# EAGLE board Connection (EAGLE 9.6.2)
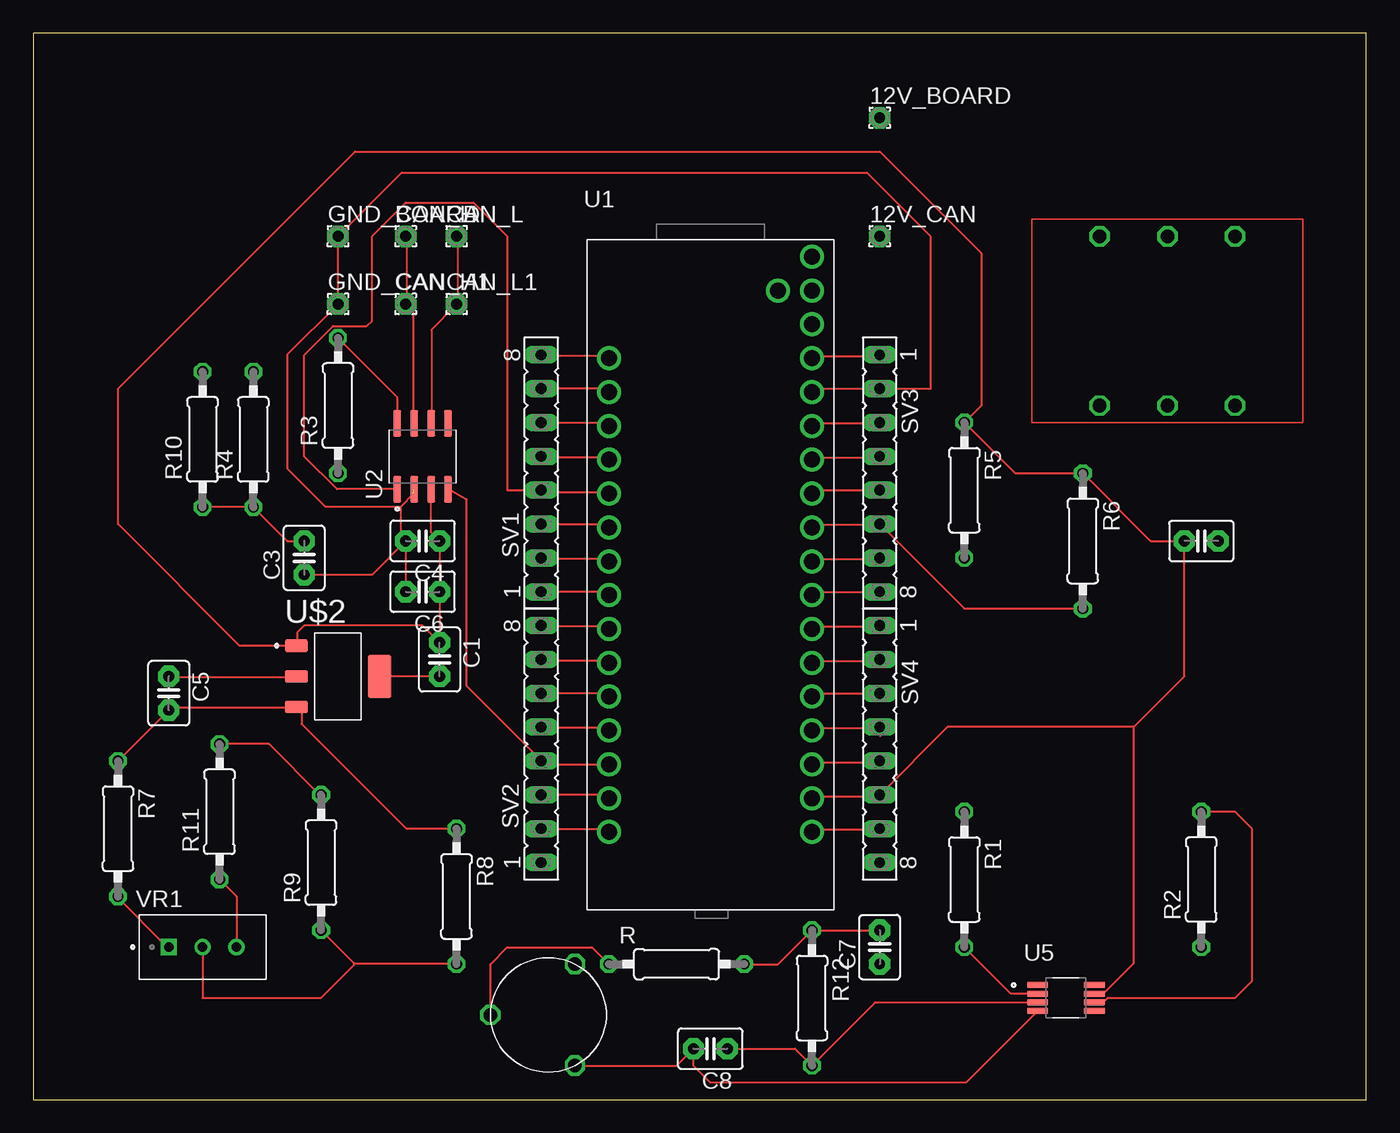
[diagram p0: board, top side]
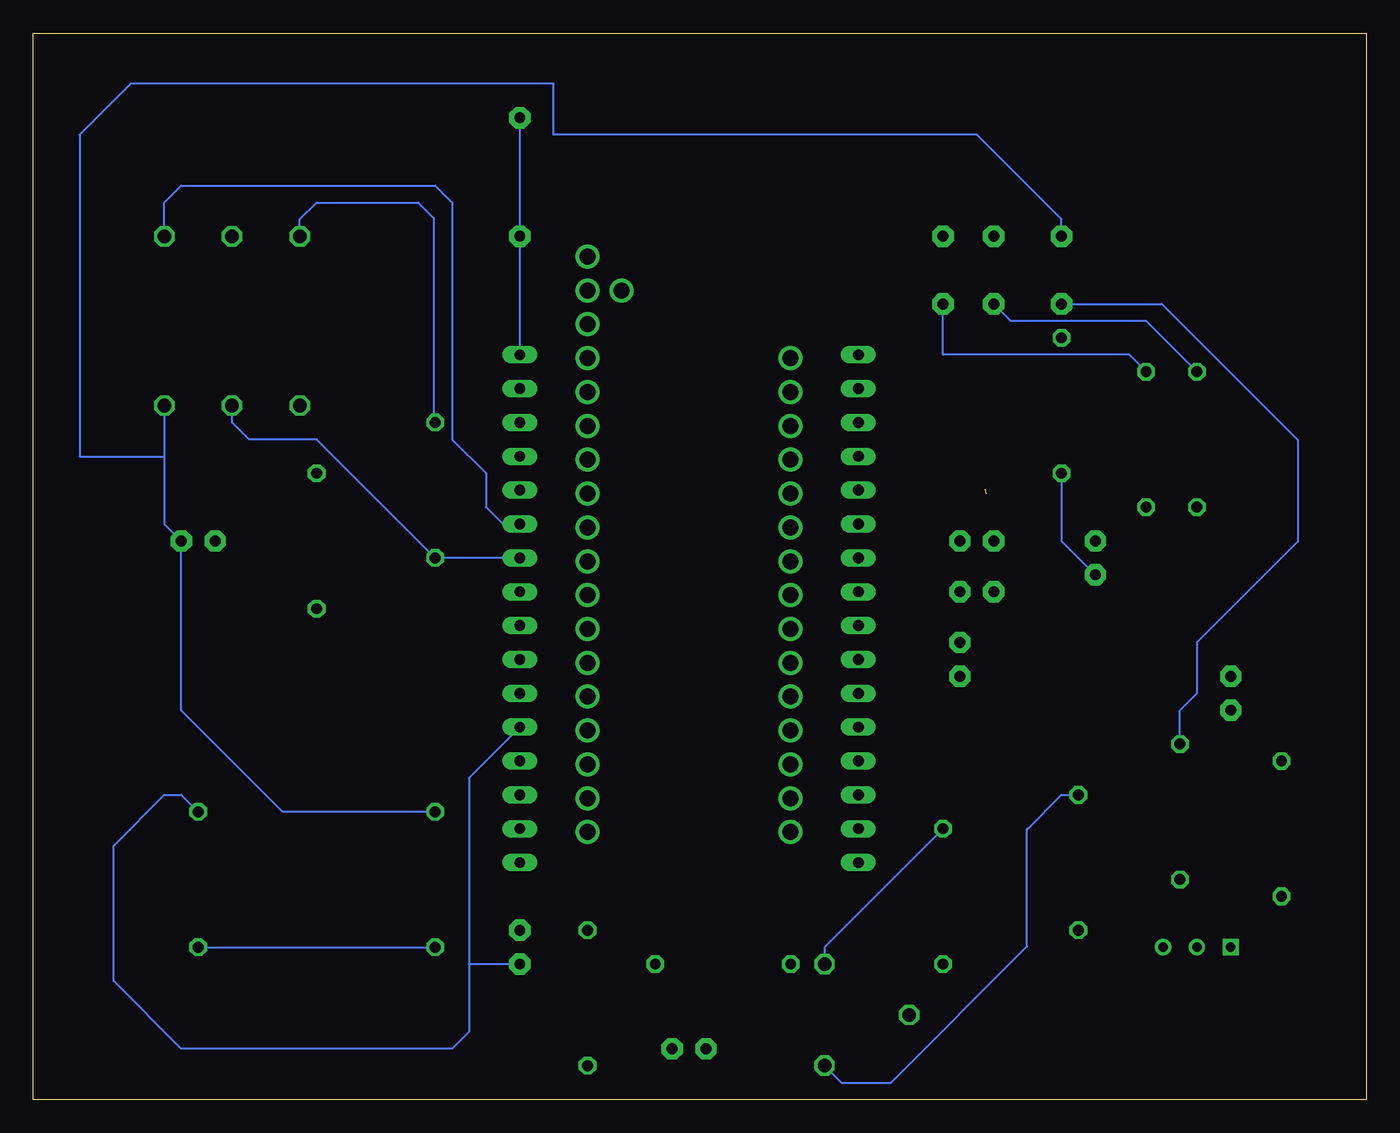
[diagram p1: board, bottom side, seen from below]

Size 100 x 80 mm. Coordinates in mm from the lower left corner, seen from the top.
Outline: 0,0 100,0 100,80 0,80 0,0
Copper layers (1*16): Top 0.035mm / dielectric 1.5mm / Bottom 0.035mm
Design rules "default": minimum track width 6mil, minimum drill 0.35mm, track to track 6mil, track to pad 6mil, pad to pad 6mil, via to via 6mil, smd to smd 6mil, copper to edge 40mil, drill to drill 6mil, minimum pad ring 10mil, minimum via ring 8mil, stop-mask expansion 4mil, vias tented up to drill 0mil, thermal gap 10mil

## Footprints (pad centres in the part's own frame; a part is rotated, then mirrored left to right if it is on the bottom)
1,6/0,8 = drill 0.813 pad 1.6 octagon: 1 0,0
C2.5-3 = drill 0.813 pad 1.6 octagon: 1 -1.27,0; 2 1.27,0
0207/10 = drill 0.813 octagon: 1 -5.08,0; 2 5.08,0
FE08 = drill 0.813 long: 1 -8.89,0; 2 -6.35,0; 3 -3.81,0; 4 -1.27,0; 5 1.27,0; 6 3.81,0; 7 6.35,0; 8 8.89,0
MODULE_NUCLEO-G431KB = drill 1.2: CN2_1 5.08,21.336; CN2_2 7.62,23.876; CN2_3 7.62,21.336; CN2_4 7.62,18.796; CN3_1 7.62,16.256; CN3_2 7.62,13.716; CN3_3 7.62,11.176; CN3_4 7.62,8.636; CN3_5 7.62,6.096; CN3_6 7.62,3.556; CN3_7 7.62,1.016; CN3_8 7.62,-1.524; CN3_9 7.62,-4.064; CN3_10 7.62,-6.604; CN3_11 7.62,-9.144; CN3_12 7.62,-11.684; CN3_13 7.62,-14.224; CN3_14 7.62,-16.764; CN3_15 7.62,-19.304; CN4_1 -7.62,16.256; CN4_2 -7.62,13.716; CN4_3 -7.62,11.176; CN4_4 -7.62,8.636; CN4_5 -7.62,6.096; CN4_6 -7.62,3.556; CN4_7 -7.62,1.016; CN4_8 -7.62,-1.524; CN4_9 -7.62,-4.064; CN4_10 -7.62,-6.604; CN4_11 -7.62,-9.144; CN4_12 -7.62,-11.684; CN4_13 -7.62,-14.224; CN4_14 -7.62,-16.764; CN4_15 -7.62,-19.304
SOIC127P599X175-8N = smd 1.97 x 0.6: 1 -2.47,1.905; 2 -2.47,0.635; 3 -2.47,-0.635; 4 -2.47,-1.905; 5 2.47,-1.905; 6 2.47,-0.635; 7 2.47,0.635; 8 2.47,1.905
SOP65P490X110-8N = smd 1.62 x 0.5: 1 -2.12,0.975; 2 -2.12,0.325; 3 -2.12,-0.325; 4 -2.12,-0.975; 5 2.12,-0.975; 6 2.12,-0.325; 7 2.12,0.325; 8 2.12,0.975
MP7227_FP = drill 1.016 octagon: P$1 0,0; P$2 3.81,-6.35; P$3 -3.81,-6.35
SOT230P700X180-4N = smd 1.76 x 0.93: 1 -3.125,2.3; 2 -3.125,0; 3 -3.125,-2.3 | smd 1.76 x 3.19: 4 3.125,0
MICS-VZ-89TE_FP = drill 1.016 octagon: P$1 0,0; P$2 5.08,0; P$3 10.16,0; P$4 0,-12.7; P$5 5.08,-12.7; P$6 10.16,-12.7
TRIM_3296W-1-203LF = drill 0.71 square: 1 -2.54,0 | drill 0.71: 2 0,0; 3 2.54,0

## Placement (x,y rotation side)
12V_BOARD  [1,6/0,8]  63.5,73.66 0 top
12V_CAN  [1,6/0,8]  63.5,64.77 0 top
C1  1.0μF  [C2.5-3]  30.48,33.02 270 top
C2  0.1μF  [C2.5-3]  87.63,41.91 0 top
C3  0.1μF  [C2.5-3]  20.32,40.64 90 top
C4  100-nF ceramic  [C2.5-3]  29.21,41.91 180 top
C5  2.2μF  [C2.5-3]  10.16,30.48 270 top
C6  4.7 uF  [C2.5-3]  29.21,38.1 180 top
C7  680nF  [C2.5-3]  63.5,11.43 90 top
C8  4.7μF  [C2.5-3]  50.8,3.81 180 top
CAN_H  [1,6/0,8]  27.94,64.77 0 top
CAN_H1  [1,6/0,8]  27.94,59.69 0 top
CAN_L  [1,6/0,8]  31.75,64.77 0 top
CAN_L1  [1,6/0,8]  31.75,59.69 0 top
GND_BOARD  [1,6/0,8]  22.86,64.77 0 top
GND_CAN  [1,6/0,8]  22.86,59.69 0 top
R  6.5kΩ  [0207/10]  48.26,10.16 0 top
R1  1000Ω  [0207/10]  69.85,16.51 270 top
R2  49000Ω  [0207/10]  87.63,16.51 90 top
R3  10000Ω  [0207/10]  22.86,52.07 90 top
R4  60Ω  [0207/10]  16.51,49.53 90 top
R5  4700  [0207/10]  69.85,45.72 270 top
R6  4700  [0207/10]  78.74,41.91 270 top
R7  10000Ω  [0207/10]  6.35,20.32 270 top
R8  1000Ω  [0207/10]  31.75,15.24 270 top
R9  1000Ω  [0207/10]  21.59,17.78 90 top
R10  60Ω  [0207/10]  12.7,49.53 90 top
R11  10000Ω  [0207/10]  13.97,21.59 90 top
R12  49000Ω  [0207/10]  58.42,7.62 270 top
SV1  [FE08]  38.1,46.99 90 top
SV2  [FE08]  38.1,26.67 90 top
SV3  [FE08]  63.5,46.99 270 top
SV4  [FE08]  63.5,26.67 270 top
U1  NUCLEO-G431KB  [MODULE_NUCLEO-G431KB]  50.8,39.37 0 top
U2  SN65HVD230  [SOIC127P599X175-8N]  29.21,48.26 90 top
U5  ADA4528-1ARMZ-R7  [SOP65P490X110-8N]  77.47,7.62 0 top
U$1  MP7227  [MP7227_FP]  34.29,6.35 90 top
U$2  MIC5233-3PIN  [SOT230P700X180-4N]  22.86,31.75 0 top
U$4  MICS-VZ-89TE  [MICS-VZ-89TE_FP]  80.01,64.77 0 top
VR1  3296W-1-203LF  [TRIM_3296W-1-203LF]  12.7,11.43 0 top

## Library data of the parts
12V_BOARD 12V_CAN CAN_H CAN_H1 CAN_L CAN_L1 GND_BOARD GND_CAN = wirepad
C1-C8 = capacitor-wima
R R1-R12 = rcl; SPICEPREFIX: R
SV1-SV4 = con-lsta; OC_FARNELL: unknown; OC_NEWARK: unknown
U1 = NUCLEO-G431KB; AVAILABILITY: In Stock; CHECK_PRICES: https://www.snapeda.com/parts/NUCLEO-G431KB/STMicroelectronics/view-part/?ref=eda; DESCRIPTION: STM32G431 Nucleo-32 STM32G4 ARM® Cortex®-M4 MCU 32-Bit Embedded Evaluation Board; MF: STMicroelectronics; MP: NUCLEO-G431KB; PACKAGE: None; PRICE: None; SNAPEDA_LINK: https://www.snapeda.com/parts/NUCLEO-G431KB/STMicroelectronics/view-part/?ref=snap
U2 = SN65HVD230; AVAILABILITY: In Stock; CHECK_PRICES: https://www.snapeda.com/parts/SN65HVD230/Texas+Instruments/view-part/?ref=eda; DESCRIPTION: 1/1 Transceiver Half CANbus 8-SOIC; MF: Texas Instruments; MP: SN65HVD230; PACKAGE: SOIC-8 Texas Instruments; PRICE: None; SNAPEDA_LINK: https://www.snapeda.com/parts/SN65HVD230/Texas+Instruments/view-part/?ref=snap
U5 = ADA4528-1ARMZ-R7; AVAILABILITY: In Stock; CHECK_PRICES: https://www.snapeda.com/parts/ADA4528-1ARMZ-R7/Analog+Devices/view-part/?ref=eda; DESCRIPTION: Precision, Ultralow Noise, RRIO, Zero-Drift Single Op Amp; MF: Analog Devices; MP: ADA4528-1ARMZ-R7; PACKAGE: MSOP-8 Analog Devices; PRICE: None; SNAPEDA_LINK: https://www.snapeda.com/parts/ADA4528-1ARMZ-R7/Analog+Devices/view-part/?ref=snap
U$1 = MP7227
U$2 = MIC5233-3.3YS
U$4 = MICS-VZ-89TE
VR1 = 3296W-1-203LF; AVAILABILITY: In Stock; CHECK_PRICES: https://www.snapeda.com/parts/3296W-1-203LF/Bourns/view-part/?ref=eda; DESCRIPTION: Trimmer, Cermet, Rest 20 Kilohms, PCB, 25 Turns, Pwr-Rtg 0.5W | Bourns 3296W-1-203LF; MF: Bourns; MP: 3296W-1-203LF; PACKAGE: NON STANDARD-3 Bourns; PRICE: None; SNAPEDA_LINK: https://www.snapeda.com/parts/3296W-1-203LF/Bourns/view-part/?ref=snap

## Nets
GND: C2.2 C3.1 C4.2 C6.2 C8.2 GND_BOARD.1 GND_CAN.1 R1.1 R3.1 R9.2 R11.2 SV3.2 U1.CN3_2 U2.2 U5.4 U$1.P$3 U$4.P$6
GND_SWD: U1.CN2_3
N$1: 12V_BOARD.1 12V_CAN.1 SV3.1 U1.CN3_1
N$2: R5.2 SV3.7 U1.CN3_7 U$4.P$5
N$3: R6.2 SV3.6 U1.CN3_6 U$4.P$3
N$4: R1.2 R2.1 U5.2
N$5: R.1 U$1.P$1
N$6: CAN_H1.1 CAN_H.1 R10.2 U2.7
N$7: CAN_L1.1 CAN_L.1 R4.2 U2.6
N$8: C1.1 C2.1 C4.1 C6.1 R5.1 R6.1 SV4.6 U1.CN3_14 U2.3 U5.7 U$2.1 U$4.P$1
N$9: SV1.4 U1.CN4_5 U2.1
N$10: SV2.4 U1.CN4_13 U2.4
N$11: R3.2 U2.8
N$12: C3.2 R4.1 R10.1
N$13: C7.1 R2.2 SV4.4 U1.CN3_12 U5.6
N$14: C5.1 U$2.2
N$15: R8.2 R9.1 VR1.2
N$16: C7.2 R12.1 R.2
N$17: C5.2 R7.1 R8.1 U$1.P$2 U$2.3
N$18: SV3.3 U1.CN3_3
N$19: SV3.4 U1.CN3_4
N$20: SV3.5 U1.CN3_5
N$21: SV3.8 U1.CN3_8
N$22: SV4.1 U1.CN3_9
N$23: SV4.2 U1.CN3_10
N$24: SV4.3 U1.CN3_11
N$25: SV4.5 U1.CN3_13
N$26: SV4.7 U1.CN3_15
N$27: SV1.1 U1.CN4_8
N$28: SV1.2 U1.CN4_7
N$29: SV1.3 U1.CN4_6
N$30: SV1.5 U1.CN4_4
N$31: SV1.6 U1.CN4_3
N$32: SV1.7 U1.CN4_2
N$33: SV1.8 U1.CN4_1
N$34: SV2.2 U1.CN4_15
N$35: SV2.3 U1.CN4_14
N$36: SV2.5 U1.CN4_12
N$37: SV2.6 U1.CN4_11
N$38: SV2.7 U1.CN4_10
N$39: SV2.8 U1.CN4_9
N$40: C1.2 U$2.4
N$41: R7.2 VR1.1
N$42: R11.1 VR1.3
N$43: C8.1 R12.2 U5.3
VCC: U1.CN2_1

## Tracks (layer width: path | path; a pad name or v marks a point on that pad's centre or on a via)
GND  (1 unrouted)
  Top 0.152: R11.2 17.68,26.67 21.49,22.86 R9.2 | SV3.2 58.67,53.34 U1.CN3_2 | 27.58,44.5 28.5,45.41 | 27.58,44.5 21.89,44.5 19.05,47.35 19.05,55.88 GND_CAN.1 GND_BOARD.1 27.64,69.55 62.53,69.55 67.31,64.77 67.31,53.34 SV3.2 | 63.55,53.34 SV3.2 | C4.2 27.58,42.27 27.58,44.5 | C4.2 C6.2 | C4.2 25.4,39.37 C3.1 | U$1.P$3 48.26,2.54 C8.2 49.53,2.54 50.8,1.27 69.97,1.27 U5.4
  Bottom 0.152: U$1.P$3 39.37,1.27 35.66,1.27 25.45,11.48 25.45,20.32 25.4,20.32 22.86,22.86 R9.2 | R11.2 13.97,29.21 12.7,30.48 12.7,34.29 5.13,41.86 5.13,49.48 15.34,59.69 GND_CAN.1 | R1.1 81.28,21.59 88.9,29.21 C2.2 90.17,43.18 90.17,48.26 | U$4.P$6 90.17,48.26 | GND_BOARD.1 22.86,66.04 29.21,72.39 60.96,72.39 60.96,76.2 92.71,76.2 96.52,72.39 96.52,48.26 90.17,48.26 | R3.1 22.86,41.91 C3.1
N$1
  Top 0.152: U1.CN3_1 58.52,55.63 58.67,55.78 63.4,55.78 SV3.1 63.55,55.93 | 63.55,73.56 12V_BOARD.1 | 63.55,64.77 12V_CAN.1
  Bottom 0.152: SV3.1 12V_CAN.1 12V_BOARD.1
N$2
  Top 0.152: SV3.7 63.4,40.54 58.67,40.54 58.52,40.39 U1.CN3_7
  Bottom 0.152: SV3.7 R5.2 78.74,49.53 83.82,49.53 85.09,50.8 U$4.P$5
N$3
  Top 0.152: U1.CN3_6 58.52,42.98 58.67,43.13 63.4,43.13 SV3.6 69.85,36.83 R6.2
  Bottom 0.152: U$4.P$3 90.17,67.31 88.9,68.58 69.85,68.58 68.58,67.31 68.58,49.53 66.04,46.99 66.04,44.45 64.77,43.18 SV3.6
N$4
  Top 0.152: U5.2 73.33,7.95 R1.2
  Bottom 0.152: R2.1 R1.2
N$5
  Top 0.152: 34.29,6.4 U$1.P$1 34.29,10.16 35.56,11.43 41.91,11.43 R.1
N$6
  Top 0.152: U2.7 28.5,50.75 28.5,59.13 CAN_H1.1 28.04,59.74 28.04,64.77 CAN_H.1
  Bottom 0.152: R10.2 16.51,58.42 26.67,58.42 CAN_H1.1
N$7
  Top 0.152: U2.6 29.87,50.75 29.87,57.76 31.7,59.59 CAN_L1.1 31.85,59.74 31.85,64.77 CAN_L.1
  Bottom 0.152: R4.2 17.78,55.88 31.75,55.88 CAN_L1.1
N$8
  Top 0.152: 20.27,34.14 19.81,34.14 | 19.81,34.14 U$2.1 15.48,34.05 6.35,43.18 6.35,53.34 24.13,71.12 63.5,71.12 71.12,63.5 71.12,52.07 R5.1 | 29.72,45.72 U2.3 29.84,42.55 C4.1 C6.1 C1.1 29.21,35.56 20.32,35.56 19.81,35.05 19.81,34.14 | 63.55,22.86 SV4.6 | U1.CN3_14 58.52,22.71 63.25,22.71 63.4,22.86 SV4.6 | 69.95,50.7 R5.1 | U5.7 79.76,8.12 80.46,8.12 82.55,10.21 82.55,27.94 | 82.55,27.94 86.36,31.75 C2.1 83.82,41.91 R6.1 73.66,46.99 R5.1 | 82.55,27.94 68.58,27.94 SV4.6
  Bottom 0.152: U$4.P$1 80.01,66.04 78.74,67.31 71.12,67.31 69.95,66.14 69.95,50.85 R5.1 | 63.55,22.86 SV4.6
N$9
  Top 0.152: 27.43,46.33 27.43,45.87 U2.1 22.79,45.79 20.32,48.26 20.32,55.87 22.49,58.04 25.02,58.04 25.4,58.42 25.4,64.77 27.94,67.31 33.02,67.31 35.56,64.77 35.56,45.72 SV1.4 38.25,45.57 43.13,45.57 U1.CN4_5
N$10
  Top 0.152: U2.4 32.51,45.02 32.51,31.04 38.1,25.45 SV2.4 38.1,25.3 38.25,25.15 U1.CN4_13
N$11
  Top 0.152: R3.2 27.3,52.7 U2.8
N$12
  Top 0.152: R10.1 R4.1 19.05,41.91 C3.2
N$13
  Top 0.152: U1.CN3_12 58.52,27.74 58.67,27.89 63.4,27.89 SV4.4 63.55,27.89 63.55,27.28 | U5.6 79.76,7.47 80.46,7.47 80.61,7.62 90.17,7.62 91.44,8.89 91.44,20.32 90.17,21.59 R2.2
  Bottom 0.152: SV4.4 67.31,24.13 67.31,10.16 | 67.31,10.16 67.31,5.08 68.58,3.81 88.9,3.81 93.98,8.89 93.98,19.05 90.17,22.86 88.9,22.86 R2.2 | C7.1 67.31,10.16
N$14
  Top 0.152: U$2.2 19.66,31.7 10.21,31.7 C5.1
N$15
  Top 0.152: 24.08,10.21 31.7,10.21 R8.2 | R9.1 24.08,10.21 | VR1.2 12.7,7.62 21.59,7.62 24.08,10.11 24.08,10.21
  Bottom 0.152: 21.49,12.65 R9.1
N$16
  Top 0.152: R.2 55.88,10.16 R12.1 C7.2
N$17
  Top 0.152: R7.1 C5.2 10.36,29.41 19.66,29.41 U$2.3 20.13,29.05 20.13,28.18 27.99,20.32 R8.1
  Bottom 0.152: R8.1 40.64,11.43 U$1.P$2
N$18
  Top 0.152: SV3.3 63.4,50.75 58.67,50.75 58.52,50.6 U1.CN3_3
N$19
  Top 0.152: SV3.4 63.4,48.16 58.67,48.16 58.52,48.01 U1.CN3_4
N$20
  Top 0.152: SV3.5 58.67,45.72 U1.CN3_5
N$21
  Top 0.152: SV3.8 58.67,38.1 U1.CN3_8
N$22
  Top 0.152: SV4.1 63.4,35.51 58.67,35.51 58.52,35.36 U1.CN3_9
N$23
  Top 0.152: SV4.2 63.4,32.92 58.67,32.92 58.52,32.77 U1.CN3_10
N$24
  Top 0.152: SV4.3 58.67,30.48 U1.CN3_11
N$25
  Top 0.152: SV4.5 63.4,25.3 58.67,25.3 58.52,25.15 U1.CN3_13
N$26
  Top 0.152: SV4.7 63.4,20.27 58.67,20.27 58.52,20.12 U1.CN3_15
N$27
  Top 0.152: SV1.1 42.98,38.1 43.13,37.95 U1.CN4_8
N$28
  Top 0.152: SV1.2 38.1,40.54 42.98,40.54 43.13,40.39 U1.CN4_7
N$29
  Top 0.152: U1.CN4_6 42.98,43.13 38.1,43.13 SV1.3
N$30
  Top 0.152: SV1.5 38.1,48.16 42.98,48.16 43.13,48.01 U1.CN4_4
N$31
  Top 0.152: U1.CN4_3 42.98,50.75 38.1,50.75 SV1.6
N$32
  Top 0.152: SV1.7 42.98,53.34 43.13,53.19 U1.CN4_2
N$33
  Top 0.152: SV1.8 38.1,55.78 42.98,55.78 43.13,55.63 U1.CN4_1
N$34
  Top 0.152: U1.CN4_15 42.98,20.27 38.1,20.27 SV2.2
N$35
  Top 0.152: SV2.3 42.98,22.86 43.13,22.71 U1.CN4_14
N$36
  Top 0.152: U1.CN4_12 42.98,27.89 38.1,27.89 SV2.5
N$37
  Top 0.152: SV2.6 42.98,30.48 43.13,30.33 U1.CN4_11
N$38
  Top 0.152: SV2.7 38.1,32.92 42.98,32.92 43.13,32.77 U1.CN4_10
N$39
  Top 0.152: U1.CN4_9 42.98,35.51 38.1,35.51 SV2.8
N$40
  Top 0.152: U$2.4 26.06,31.85 26.16,31.75 C1.2
N$41
  Top 0.152: VR1.1 10.06,11.43 6.25,15.24 R7.2
N$42
  Top 0.152: VR1.3 15.24,15.24 R11.1
N$43
  Top 0.152: C8.1 57.15,3.81 R12.2 63.17,7.29 U5.3